# Altium PCB cytron sheild.PcbDoc
Units mm, origin at the board's own origin, x right, y up, seen from the top; angles counter-clockwise.
Board outline 50 x 80 mm, 2 copper layers (Top Layer, Bottom Layer); 9 components, 11 nets, 45 pads, 7 vias.
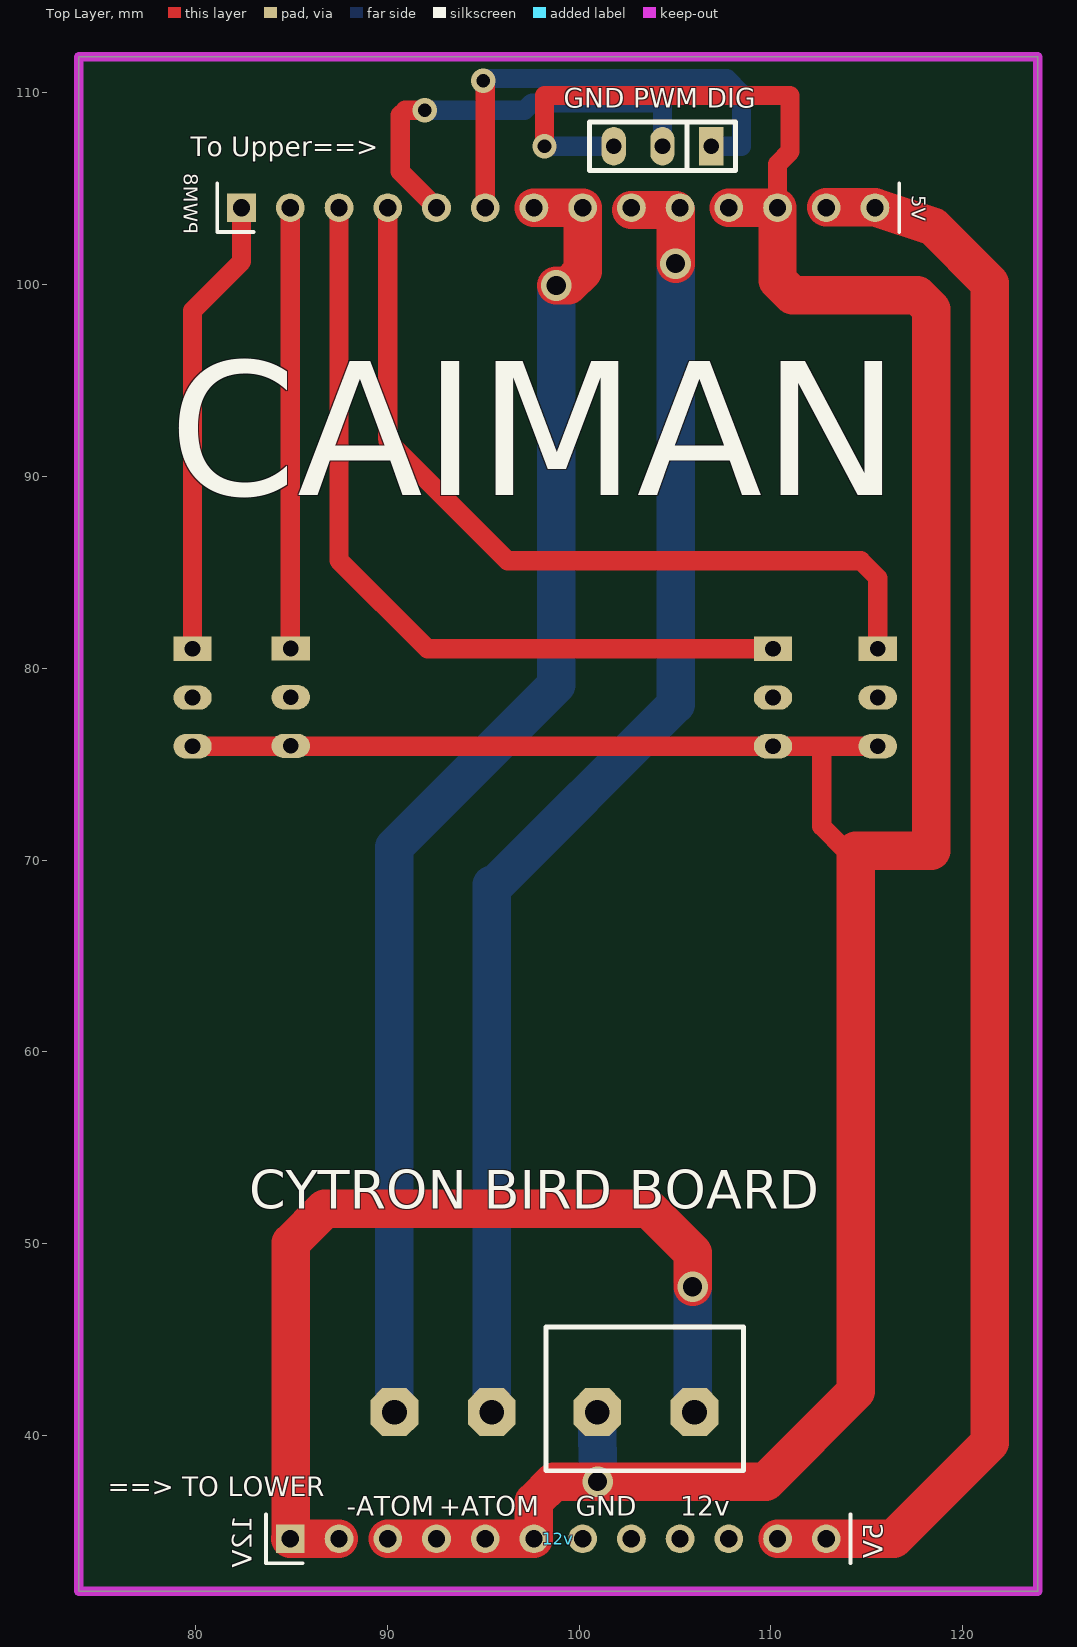
[diagram p0: Top Layer view]
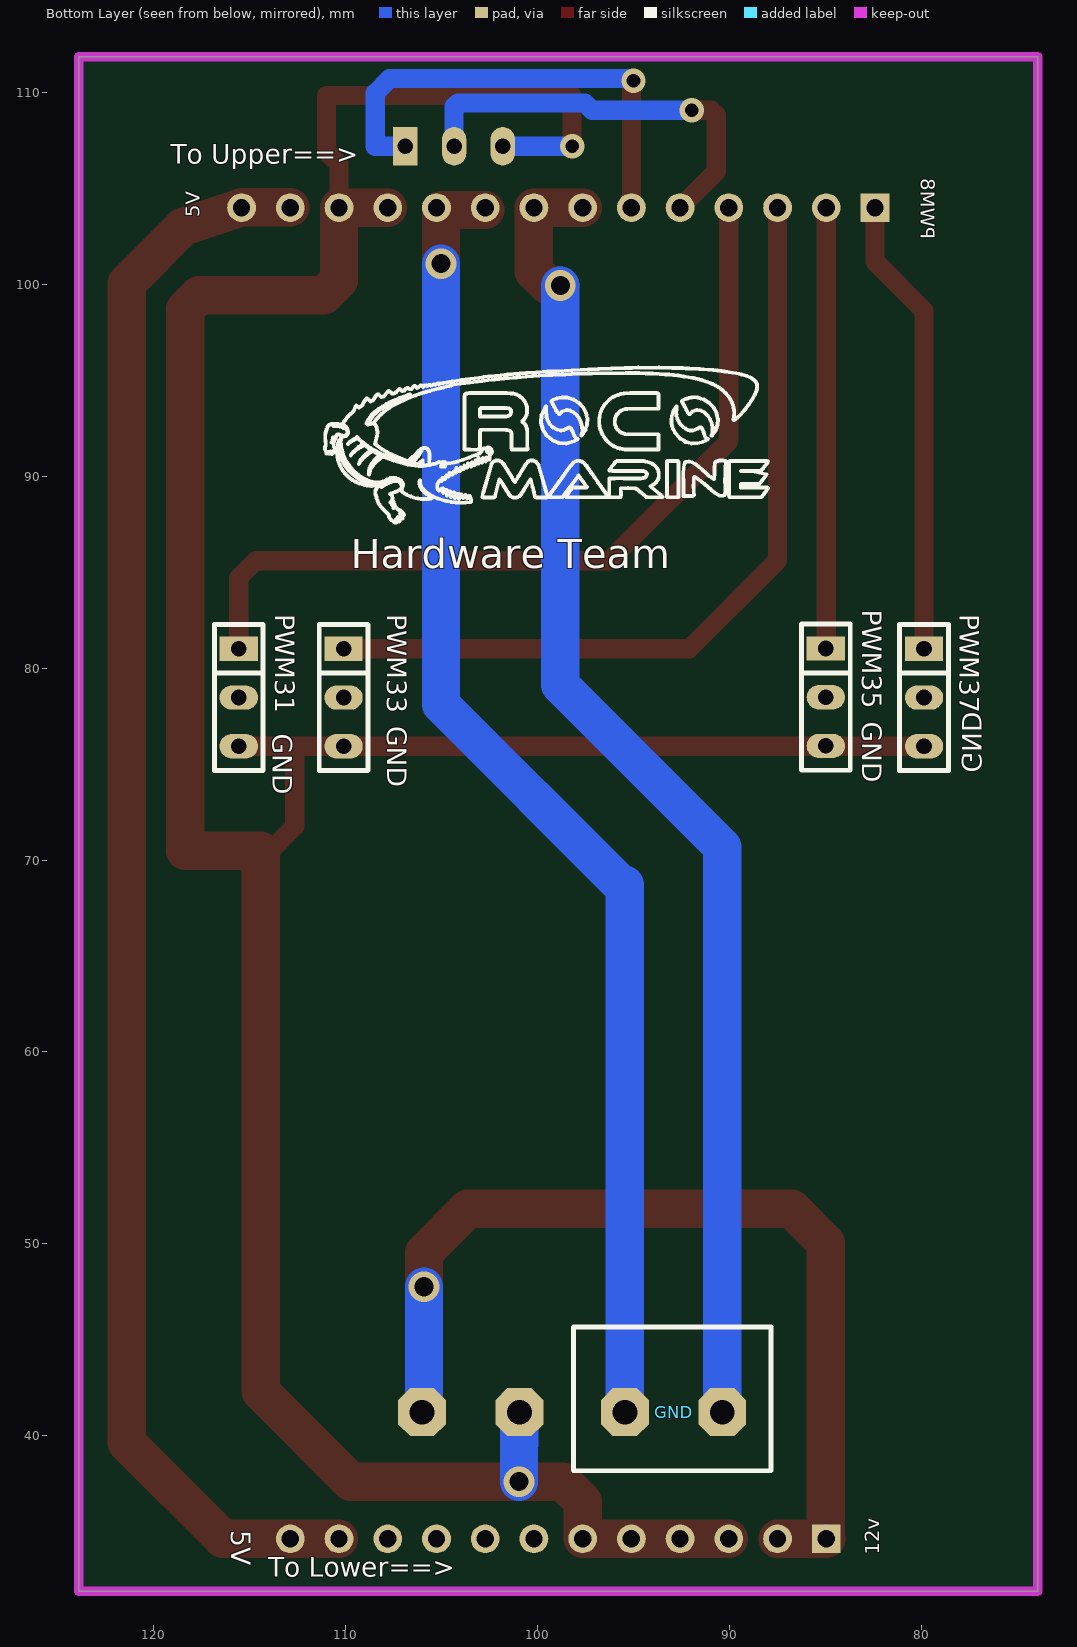
[diagram p1: Bottom Layer view, seen from below]

## Layer stack, top to bottom
Top Solder: solder mask 0.0102, Solder Resist, Dk 3.5
Top Layer: signal copper 0.0356
Dielectric 1: dielectric 0.32, FR-4, Dk 4.8
Bottom Layer: signal copper 0.0356
Bottom Solder: solder mask 0.0102, Solder Resist, Dk 3.5

## Board outline
73.914,111.877 73.914,31.877 123.914,31.877 123.914,111.877

## Design rules (kind name [scope] priority, off if disabled: settings)
Clearance [All] p1: gap=0.254 ignorepadtopadclearanceinfootprint=FALSE except(0: Arc-Hole Track-Hole SMDPad-Hole THPad-Hole Via-Hole Fill-Hole Poly-Hole Region-Hole Text-Hole)
PolygonConnect [All] p1: connectstyle=Relief reliefconductorwidth=0.254 reliefentries=4 polygonreliefangle="90 Angle" airgapwidth=0.254
RoutingVias [All] p1: holewidth=0.711 width=1.27 viastyle="Through Hole" minholewidth=0.711 minwidth=1.27 maxholewidth=0.711 maxwidth=1.27
SolderMaskExpansion [All] p1: expansion=0.102
Width [All] p1: maxlimit=5 minlimit=1 preferedwidth=1
30 further rules are at their usual default settings.

## Classes and differential pairs
component class "cytron sheild": 12v gnd GND "GND PWM DIG" PWM8

## Components (designator, comment, footprint, x,y, rotation, side; value= is the part's Value field where it differs from the comment)
12v "power interface" HDR1X12 84.944,34.61 r0 top (schematic designator P)
12v "Rossetta" "Rossetta 2-pin" 100.946,41.21 r180 top (schematic designator RO1)
GND "motor8" SIP3 79.846,81.01 r270 bottom (schematic designator M8)
GND "motor7" SIP3 84.963,81.026 r270 bottom (schematic designator M7)
GND "motor6" SIP3 110.109,81.01 r270 bottom (schematic designator M6)
GND "motor5" SIP3 115.57,81.01 r270 bottom (schematic designator M5)
GND "Rossetta" "Rossetta 2-pin" 95.446,41.21 r0 bottom (schematic designator RO2)
"GND PWM DIG" "HEADER 3" SIP3 106.886,107.21 r180 top (schematic designator JP1)
PWM8 "signal interface" HDR1X14 82.404,104.01 r0 top (schematic designator S)

## Footprints (in the part's own frame and the unit in brackets; to place one, negate y for a bottom-side part, rotate by r counter-clockwise, add the part's x,y. Pads: shape width x height; smd on the part's side, far side on the other; paste and mask are expansions set on the pad)
HDR1X12 [mm] "Connector; Header; 12 Position"
  rect 1.5x1.5 hole 0.9: 1(0,0)
  round 1.5 hole 0.9: 2(2.54,0) 3(5.08,0) 4(7.62,0) 5(10.16,0) 6(12.7,0) 7(15.24,0) 8(17.78,0) 9(20.32,0) 10(22.86,0) 11(25.4,0) 12(27.94,0)
  silkscreen extent -1.27,-1.27 29.21,1.27
HDR1X14 [mm] "Connector; Header; 14 Position"
  rect 1.5x1.5 hole 0.9: 1(0,0)
  round 1.5 hole 0.9: 2(2.54,0) 3(5.08,0) 4(7.62,0) 5(10.16,0) 6(12.7,0) 7(15.24,0) 8(17.78,0) 9(20.32,0) 10(22.86,0) 11(25.4,0) 12(27.94,0) 13(30.48,0) 14(33.02,0)
  silkscreen extent -1.27,-1.27 34.29,1.27
"Rossetta 2-pin" [mm]
  oct 2.5x2.5 hole 1.3: 1(0,0) 2(-5.08,0)
  silkscreen extent -7.62,-4.45 2.67,3.05, body extent -7.62,-3.43 2.54,4.07, height 10
SIP3 [mm]
  rect 1.27x2 hole 0.813: 1(0,0)
  oval 1.27x2 hole 0.813: 2(2.54,0) 3(5.08,0)
  silkscreen extent -1.27,-1.27 6.35,1.27

## Part data
12v: library part "Header 12", "Header, 12-Pin"
GND GND GND GND: library part "HEADER 3"
PWM8: library part "Header 14", "Header, 14-Pin"

## Via types
v1: diameter 1.6, hole 1, Top Layer to Bottom Layer, 4 vias
v2: diameter 1.27, hole 0.711, Top Layer to Bottom Layer, 3 vias

## Nets (pads, with @x,y where several pads share a name; then routed paths per layer and width w, separated by ;. In a path a pad name is that pad's centre, name@x,y a point inside that pad or via, vN(x,y) a via of type N, cw(c..) or ccw(c..) an arc to the next point about the centre after c; other vN are vias at no path point)
5V: 12v.11 12v.12 PWM8.13 PWM8.14 | length 83.5
  Top Layer w2: 12v.11 12v.12 116.398,34.61 121.412,39.624 121.412,100.076 118.478,103.01 115.424,104.026 PWM8.13@112.884,104.026
12V: 12v.1@84.944,34.61 12v.2 | length 49.1
  Top Layer w2: 12v.1@84.944,34.61 12v.2@87.484,34.61 ; 12v.1@84.963,34.845 84.963,47.879 84.963,50.038 86.741,51.816 103.632,51.816 105.918,49.53 v1(105.918,47.752)
  Bottom Layer w1: 12v.1@84.944,34.61 84.836,34.718 12v.1@84.963,34.845 ; 12v.2@105.918,41.356 106.045,41.229 12v.2@106.026,41.21
  Bottom Layer w2: 12v.2@105.918,41.356 v1(105.918,47.752)
+MICRO: GND.2@90.366,41.21 PWM8.7 PWM8.8 | length 69.8
  Top Layer w2: PWM8.7@97.644,104.013 100.184,104.013 100.184,100.692 99.441,99.949 v1(98.806,99.949)
  Bottom Layer w2: GND.2@90.366,41.21 90.366,63.188 90.366,70.681 98.806,79.121 v1(98.806,99.949)
-MICRO: GND.1@95.446,41.21 PWM8.9 PWM8.10 | length 69.1
  Top Layer w2: PWM8.9@102.724,103.886 105.029,103.886 v1(105.029,101.092)
  Bottom Layer w2: GND.1@95.446,41.21 95.446,68.707 ; 95.504,68.58 105.029,78.105 v1(105.029,101.092)
GND: 12v.1@100.946,41.21 12v.3 12v.4 12v.5 12v.6 "GND PWM DIG.3" GND.3 PWM8.11 PWM8.12 | length 174.5
  Top Layer w1: GND.3@79.846,75.93 110.109,75.93 GND.3@115.57,75.93 ; v2(98.193,107.21) 98.193,109.855 110.998,109.855 110.998,106.934 110.344,106.28 PWM8.12@110.344,104.013 ; 112.649,75.74 112.649,71.755 113.919,70.485
  Top Layer w2: 12v.3 12v.4 12v.5 12v.6 97.644,36.557 98.679,37.592 109.728,37.592 114.427,42.291 114.427,70.485 118.364,70.485 118.364,98.722 117.645,99.441 111.125,99.441 110.344,100.222 PWM8.12 ; PWM8.11@107.804,104.013 PWM8.12@110.344,104.013
  Bottom Layer w1: v2(98.193,107.21) 101.806,107.21 101.727,107.289
  Bottom Layer w2: 12v.1@100.946,41.21 v1(100.965,37.592)
PWM5: GND.1@115.57,81.01 PWM8.4 | length 44.2
  Top Layer w1: 90.024,91.967 PWM8.4 ; 90.043,91.821 96.266,85.598 114.681,85.598 115.57,84.709 GND.1@115.57,81.01
PWM6: GND.1@110.109,81.01 PWM8.3 | length 42.9
  Top Layer w1: PWM8.3 87.484,85.617 92.091,81.01 GND.1@110.109,81.01
PWM7: GND.1@84.963,81.026 PWM8.2 | length 23
  Top Layer w1: GND.1@84.944,81.012 PWM8.2@84.944,104.013
  Bottom Layer w1: GND.1@84.944,81.012 GND.1@84.946,81.01
PWM8: GND.1@79.846,81.01 PWM8.1 | length 24.1
  Top Layer w1: GND.1@79.846,81.01 79.846,98.642 82.404,101.2 PWM8.1
UDIRECTION: "GND PWM DIG.1" PWM8.6 | length 24.9
  Top Layer w1: v2@94.996,110.744 v2(94.996,110.617) 95.104,110.509 PWM8.6
  Bottom Layer w1: v2@94.996,110.744 107.696,110.744 108.458,109.982 108.458,107.21 106.886,107.21
UPWM: "GND PWM DIG.2" PWM8.5 | length 21.7
  Top Layer w1: v2(91.948,109.093) 90.932,109.093 90.678,108.839 90.678,105.896 PWM8.5
  Bottom Layer w1: v2(91.948,109.093) 97.155,109.093 97.536,109.474 104.14,109.474 104.346,109.268 104.346,107.21
pads on no net: 12v.7 12v.8 12v.9 12v.10 GND.2@79.846,78.47 GND.2@84.963,78.486 GND.2@110.109,78.47 GND.2@115.57,78.47

## Keep-outs
Keep-Out Layer:
  the board outline again, w0.5

## Silkscreen, mask and mechanical layers (free items; w line width, h text height)
Top Overlay:
  text "To Upper==>" at 79.756,106.68 h1
  text "5V" at 117.348,104.648 h0.75 r270
  text "CAIMAN" at 78.613,89.027 h7
  text "CYTRON BIRD BOARD" at 82.804,51.816 h2
  text "==> TO LOWER" at 75.438,36.83 h1
  text "12V" at 82.931,35.814 h1 r90
  text "MOTA-" at 92.456,35.814 h1
  text "MOTA+" at 97.917,35.814 h1
  text "5V" at 115.824,35.433 h1 r90
Bottom Overlay:
  drawing of 1936 lines, arcs and shapes, not listed
  text "To Upper==>" at 119.126,106.299 h1
  text "5V" at 117.602,103.505 h0.75 r270
  text "PWM8" at 80.01,102.362 h0.75 r90
  text "Hardware Team" at 109.728,85.217 h1.52
  text "PWM35" at 83.058,83.058 h1 r90
  text "PWM37" at 77.978,82.804 h1 r90
  text "PWM33" at 107.823,82.804 h1 r90
  text "PWM31" at 113.665,82.804 h1 r90
  text "5V" at 115.951,35.052 h1 r90
  text "To Lower==>" at 114.046,32.639 h1